# EAGLE board v1draft (EAGLE 7.3.0)
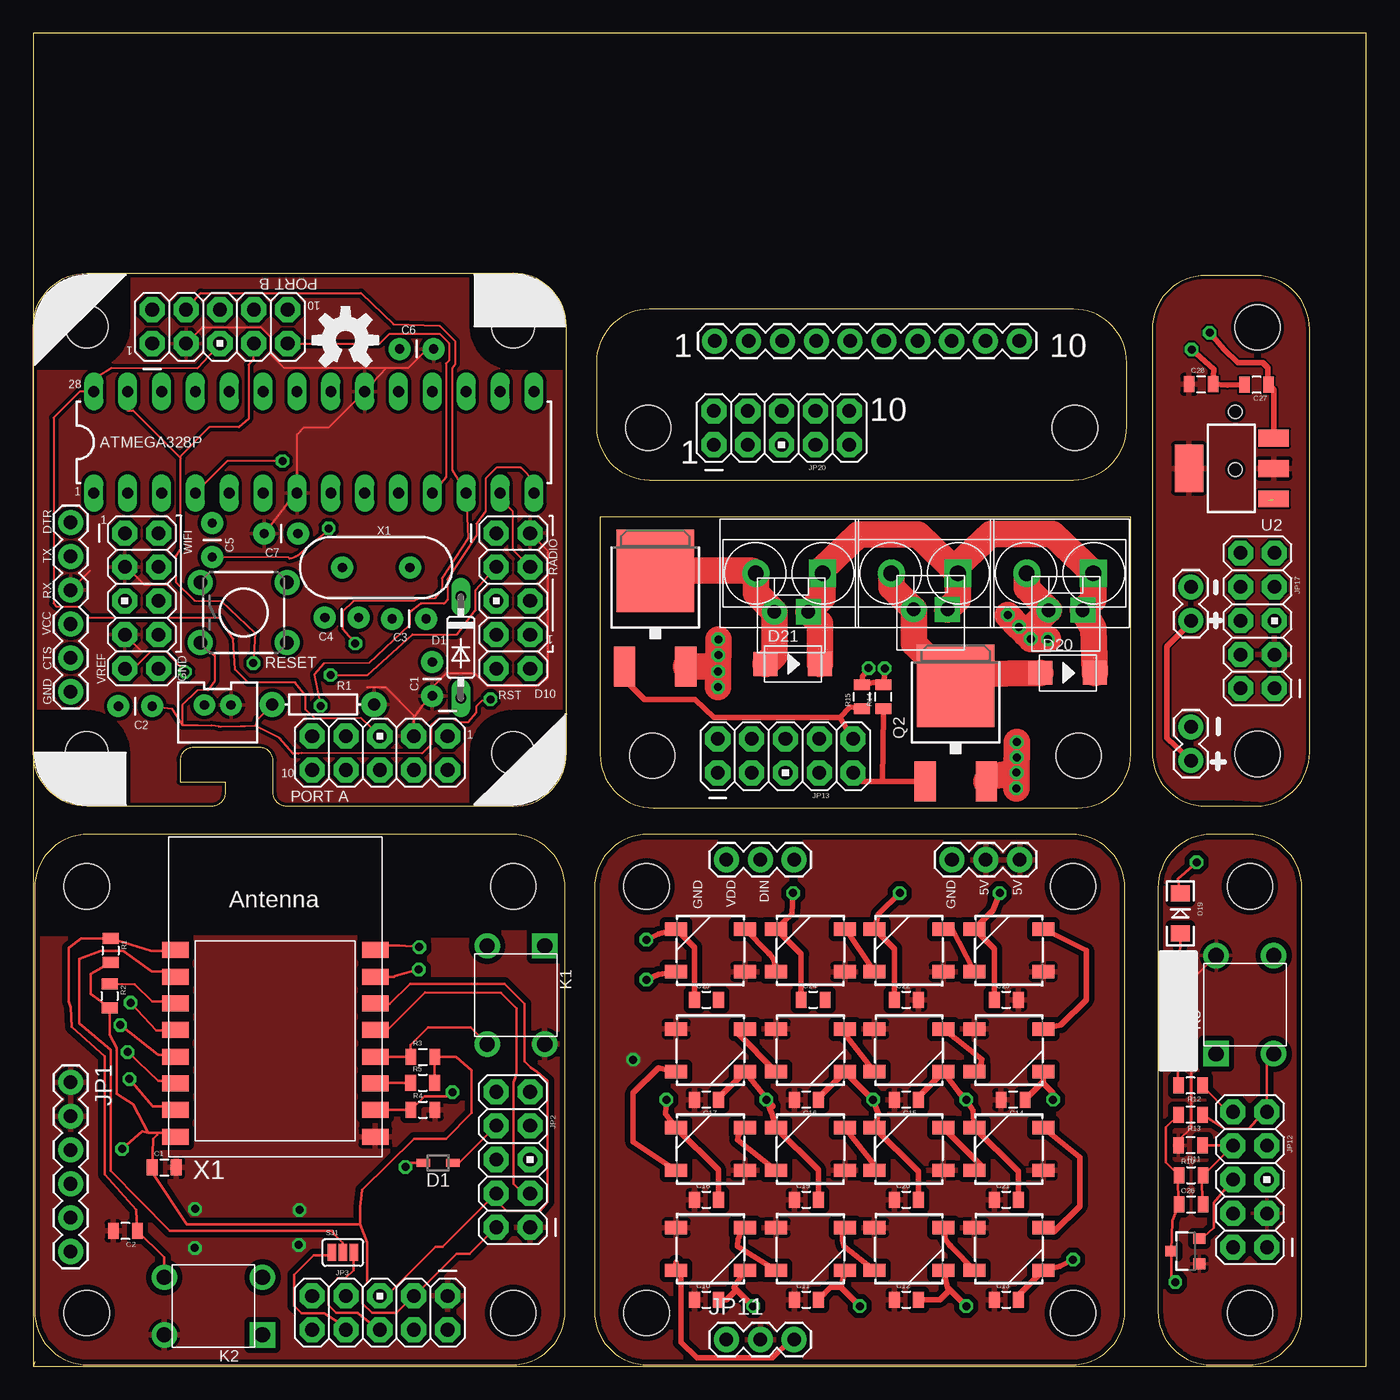
[diagram p0: board, top side]
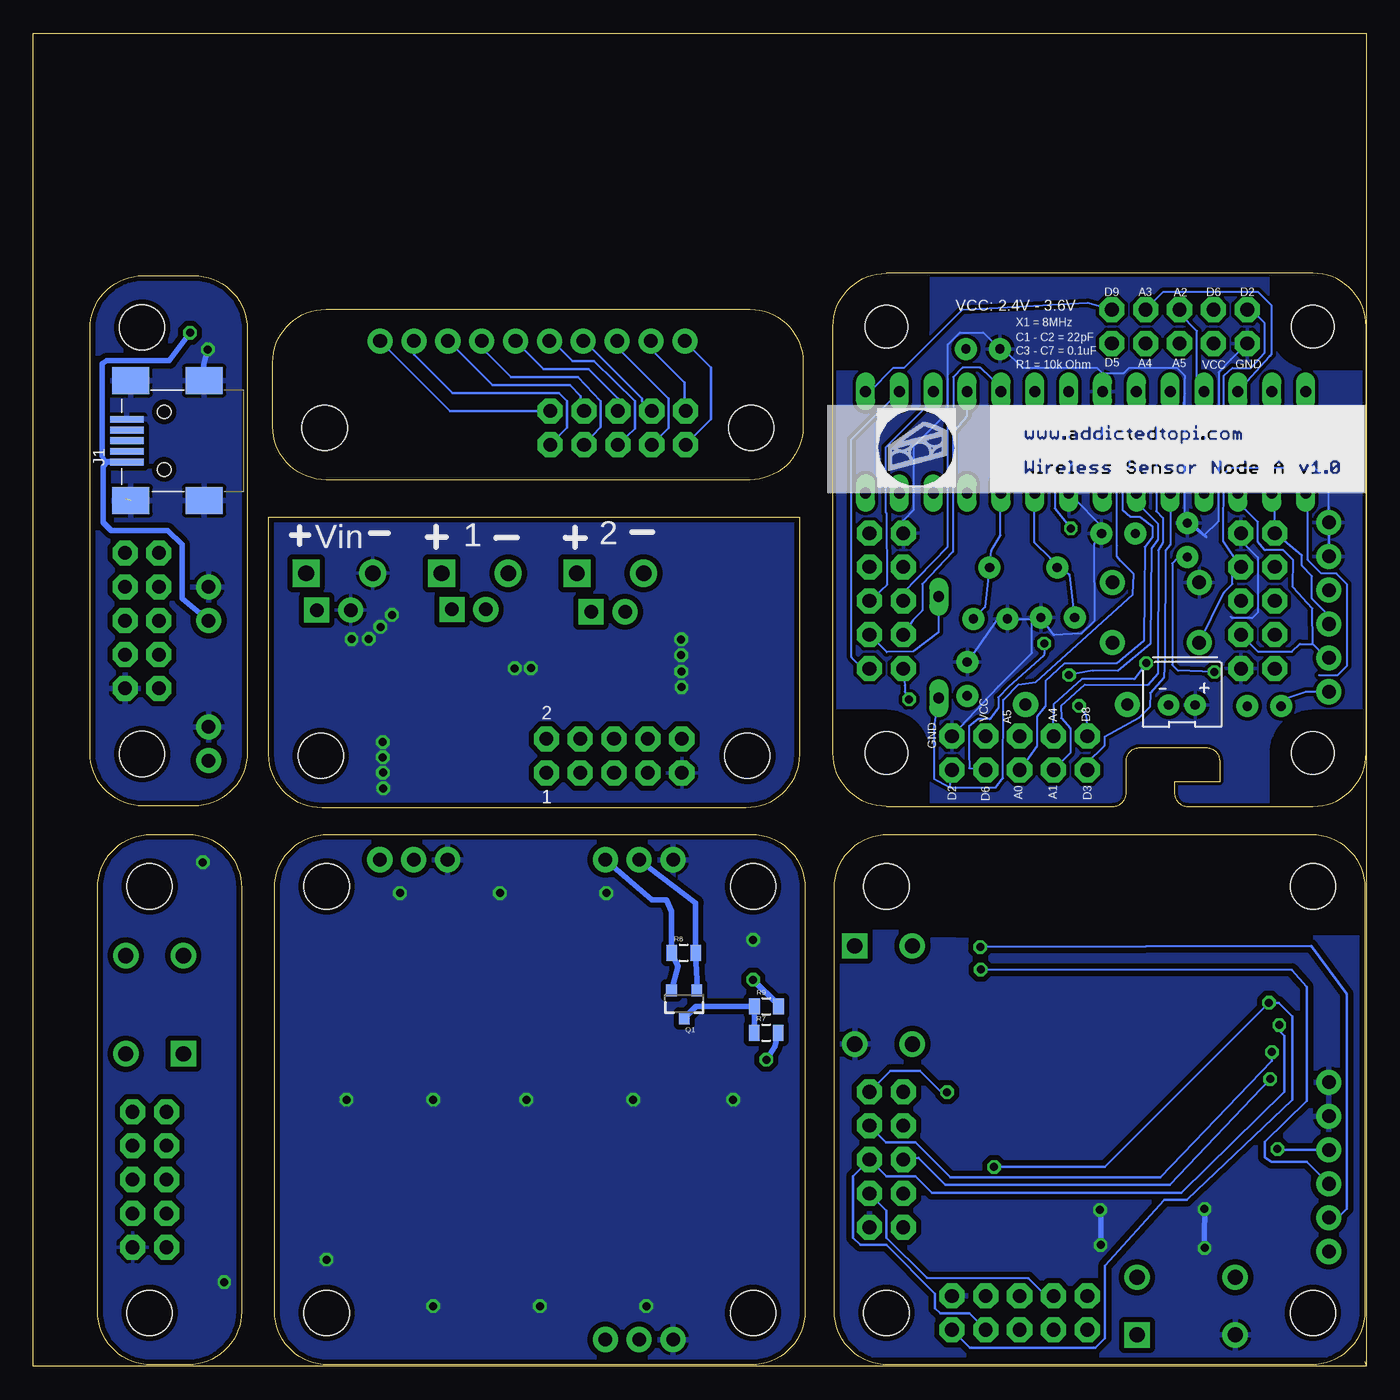
[diagram p1: board, bottom side, seen from below]

Size 100 x 100 mm. Coordinates in mm from the lower left corner, seen from the top.
Outline: 0.11,0.34 0,0
Outline: 0,0 100,0 100,100 0,100 0,0
Outline: 0.1,35.9 0.1,4.1 arc90 4.1,0.1 35.9,0.1 arc90 39.9,4.1 39.9,35.9 arc90 35.9,39.9 4.1,39.9 arc90 0.1,35.9
Outline: 36,42 19,42 arc-90 18,43 18,45.41 arc90 17,46.41 12,46.41 arc90 11,45.41 11,43.84 14.38,43.84 14.38,43 arc-90 13.38,42 4,42 arc-90 0,46 0,78 arc-90 4,82 36,82 arc-90 40,78 40,46 arc-90 36,42
Outline: 42.1,35.9 42.1,4.1 arc90 46.1,0.1 77.9,0.1 arc90 81.9,4.1 81.9,35.9 arc90 77.9,39.9 46.1,39.9 arc90 42.1,35.9
Outline: 88.38,0.1 91.18,0.1 arc90 95.18,4.1 95.18,35.9 arc90 91.18,39.9 88.38,39.9 arc90 84.38,35.9 84.38,4.1 arc90 88.38,0.1
Outline: 42.53,63.69 42.53,45.89 arc90 46.53,41.89 78.33,41.89 arc90 82.33,45.89 82.33,63.69 42.53,63.69
Outline: 87.95,42.03 91.75,42.03 arc90 95.75,46.03 95.75,77.83 arc90 91.75,81.83 87.95,81.83 arc90 83.95,77.83 83.95,46.03 arc90 87.95,42.03
Outline: 42.24,75.3 42.24,70.5 arc90 46.24,66.5 78.04,66.5 arc90 82.04,70.5 82.04,75.3 arc90 78.04,79.3 46.24,79.3 arc90 42.24,75.3
Copper layers (1*16): Top 0.035mm / dielectric 1.5mm / Bottom 0.035mm
Design rules "DFRobot_Eagle_Rule_v0.4": minimum track width 6mil, minimum drill 12mil, track to track 6mil, track to pad 6mil, pad to pad 6mil, via to via 6mil, smd to smd 0mil, copper to edge 10mil, drill to drill 10mil, minimum pad ring 12mil, minimum via ring 8mil, stop-mask expansion 2mil, vias tented up to drill 25mil, thermal gap 10mil
Holes 3.4 mm at 4,4 36,36 36,4 4,36 46,4 46,36 78,36 78,4 91.28,4 91.28,36 46.43,45.79 78.43,45.79 91.85,45.93 91.85,77.93 46.14,70.4 78.14,70.4
tRestrict: 16 lines
bRestrict: 16 lines

## Footprints (pad centres in the part's own frame; a part is rotated, then mirrored left to right if it is on the bottom)
0805 = smd 0.8 x 1.2: 1 -0.9,0; 2 0.9,0
CAP-PTH-SMALL = drill 0.7 pad 1.651: 1 0,0; 2 2.54,0
SOD323 = smd 1 x 0.6: 1 -1.1,0; 2 1.1,0
DO35-7 = drill 0.813 long: A 3.81,0; C -3.81,0
WS2812B = smd 1.651 x 1: 1 -2.577,1.6; 2 -2.577,-1.6; 3 2.577,-1.6; 4 2.577,1.6
LED-1206 = smd 1.2 x 1.4: A -1.5,0; C 1.5,0
DO-214AC = smd 1.8 x 1.77: 1 -2.042,0; 2 2.042,0
MINIUSB5+4P-SMD-0.8-90D = smd 2.54 x 0.508: 1 0.381,-1.6; 2 0.381,-0.8; 3 0.381,0; 4 0.381,0.8; 5 0.381,1.6 | smd 2.794 x 2: P$1 6.175,4.5; P$2 6.175,-4.5; P$3 0.675,4.5; P$4 0.675,-4.5 | hole 1.016: 3.175,-2.159; 3.175,2.159
1X06 = drill 1.016 pad 1.88: 1 0,0; 2 2.54,0; 3 5.08,0; 4 7.62,0; 5 10.16,0; 6 12.7,0
AVR_ICSP = drill 1.016 pad 1.88 octagon: 1 -1.27,5.08; 2 1.27,5.08; 3 -1.27,2.54; 4 1.27,2.54; 5 -1.27,0; 6 1.27,0; 7 -1.27,-2.54; 8 1.27,-2.54; 9 -1.27,-5.08; 10 1.27,-5.08
JST-2-PTH-VERT = drill 0.7 pad 1.6: 1 -1,-0.55; 2 1,-0.55
1X03 = drill 1.016 pad 1.88: 1 0,0; 2 2.54,0; 3 5.08,0
MOLEX-1X2 = drill 1.016 pad 1.88 square: 1 0,0 | drill 1.016 pad 1.88: 2 2.54,0
1X02 = drill 1.016 pad 1.88: 1 0,0; 2 2.54,0
1X10 = drill 1.016 pad 1.88: 1 0,0; 2 2.54,0; 3 5.08,0; 4 7.62,0; 5 10.16,0; 6 12.7,0; 7 15.24,0; 8 17.78,0; 9 20.32,0; 10 22.86,0
SW4-6.0X6.0X5.0MM = drill 1.143 pad 1.905 square: 1 -3.683,2.159 | drill 1.143 pad 1.905: 2 -3.683,-2.159; 3 3.683,-2.159; 4 3.683,2.159
SOT23-3 = smd 0.8 x 0.9: 1 -0.95,-1; 2 0.95,-1; 3 0,1.1
DPAK = smd 3 x 1.6: 1 0,-2.3; 2 0,2.3 | smd 6.2 x 5.8: 3 -7.18,0
AXIAL-0.3 = drill 0.9 pad 1.88: P$1 -3.81,0; P$2 3.81,0
TACTILE-PTH = drill 1.016 pad 1.88: 1 -3.251,2.261; 2 3.251,2.261; 3 -3.251,-2.261; 4 3.251,-2.261
PAD-JUMPER-3-NO_YES_SILK = smd 0.635 x 1.27: 1 -0.813,0; 2 0,0; 3 0.813,0
DIL28-3 = drill 0.813 long: 1 -16.51,-3.81; 2 -13.97,-3.81; 3 -11.43,-3.81; 4 -8.89,-3.81; 5 -6.35,-3.81; 6 -3.81,-3.81; 7 -1.27,-3.81; 8 1.27,-3.81; 9 3.81,-3.81; 10 6.35,-3.81; 11 8.89,-3.81; 12 11.43,-3.81; 13 13.97,-3.81; 14 16.51,-3.81; 15 16.51,3.81; 16 13.97,3.81; 17 11.43,3.81; 18 8.89,3.81; 19 6.35,3.81; 20 3.81,3.81; 21 1.27,3.81; 22 -1.27,3.81; 23 -3.81,3.81; 24 -6.35,3.81; 25 -8.89,3.81; 26 -11.43,3.81; 27 -13.97,3.81; 28 -16.51,3.81
SOT-223 = smd 1.27 x 2.286: 1 -2.286,-3.175; 2 0,-3.175; 3 2.286,-3.175 | smd 3.556 x 2.159: TER 0,3.175
DP4040_V1_NOLINES = hole 3.2: -16,-16; 16,-16; 16,16; -16,16
H2-5.0-10.5X8.0MM = drill 1.168 pad 2.032 square: 1 0,2.5 | drill 1.168 pad 2.032: 2 0,-2.5
ESP-12 = smd 2 x 1.2: 1 -7.5,4.5; 2 -7.5,2.5; 3 -7.5,0.5; 4 -7.5,-1.5; 5 -7.5,-3.5; 6 -7.5,-5.5; 7 -7.5,-7.5; 8 -7.5,-9.5; 9 7.5,-9.5; 10 7.5,-7.5; 11 7.5,-5.5; 12 7.5,-3.5; 13 7.5,-1.5; 14 7.5,0.5; 15 7.5,2.5; 16 7.5,4.5
HC49US = drill 0.7 pad 1.651: 1 -2.54,0; 2 2.54,0

## Placement (x,y rotation side)
C1  [0805]  9.82,14.91 0 top
C2  [0805]  6.9,10.15 180 top
C3  [CAP-PTH-SMALL]  29.93,50.29 90 top
C4  [CAP-PTH-SMALL]  8.92,49.51 180 top
C5  [CAP-PTH-SMALL]  29.46,56.07 180 top
C6  [CAP-PTH-SMALL]  21.87,56.17 0 top
C7  [CAP-PTH-SMALL]  13.42,60.71 90 top
C8  [CAP-PTH-SMALL]  30.03,76.32 180 top
C9  [CAP-PTH-SMALL]  17.32,62.47 0 top
C10  [0805]  50.5,5 0 top
C11  [0805]  58,5 0 top
C12  [0805]  65.5,5 0 top
C13  [0805]  73,5 0 top
C14  [0805]  73.5,20 180 top
C15  [0805]  65.5,20 180 top
C16  [0805]  58,20 180 top
C17  [0805]  50.5,20 180 top
C18  [0805]  50.5,12.5 0 top
C19  [0805]  58,12.5 0 top
C20  [0805]  65.5,12.5 0 top
C21  [0805]  73,12.5 0 top
C22  [0805]  65.5,27.5 0 top
C23  [0805]  50.5,27.5 0 top
C24  [0805]  58.5,27.5 0 top
C25  [0805]  73,27.5 0 top
C26  [0805]  86.86,12.13 0 top
C27  [0805]  91.78,73.64 180 top
C28  [0805]  87.61,73.67 0 top
D1  [SOD323]  30.37,15.26 180 top
D2  1N4148DO35-7  [DO35-7]  32.07,53.93 270 top
D3  [WS2812B]  50.8,23.7 0 top
D4  [WS2812B]  58.3,23.7 0 top
D5  [WS2812B]  65.7,23.7 0 top
D6  [WS2812B]  73.2,23.7 0 top
D7  [WS2812B]  73.2,16.3 180 top
D8  [WS2812B]  65.7,16.3 180 top
D9  [WS2812B]  58.3,16.3 180 top
D10  [WS2812B]  58.3,8.8 0 top
D11  [WS2812B]  65.7,8.8 0 top
D12  [WS2812B]  73.2,8.8 0 top
D13  [WS2812B]  73.2,31.2 180 top
D14  [WS2812B]  65.7,31.2 180 top
D15  [WS2812B]  58.3,31.2 180 top
D16  [WS2812B]  50.8,31.2 180 top
D17  [WS2812B]  50.8,16.3 180 top
D18  [WS2812B]  50.8,8.8 0 top
D19  [LED-1206]  86.05,33.96 90 top
D20  DIODE-GEN-PURPOSE-1KV-1A(DO-214AC)  [DO-214AC]  77.61,52.02 0 top
D21  DIODE-GEN-PURPOSE-1KV-1A(DO-214AC)  [DO-214AC]  56.99,52.68 0 top
J1  [MINIUSB5+4P-SMD-0.8-90D]  93.36,69.44 0 bottom
JP1  [1X06]  2.8,21.3 270 top
JP2  [AVR_ICSP]  36,15.5 180 top
JP3  [AVR_ICSP]  26,4 270 top
JP4  M05X2PTH  [AVR_ICSP]  14,78 90 top
JP5  M05X2PTH  [AVR_ICSP]  26,46 270 top
JP6  [1X06]  2.8,63.3 270 top
JP7  M02JST-PTH-VERT  [JST-2-PTH-VERT]  13.83,49.05 180 top
JP8  M05X2PTH  [AVR_ICSP]  8.13,57.42 0 top
JP9  [1X03]  74,38 180 top
JP10  [1X03]  52,38 0 top
JP11  [1X03]  52,2 0 top
JP12  [AVR_ICSP]  91.28,14 180 top
JP13  [AVR_ICSP]  56.43,45.79 90 top
JP14  [MOLEX-1X2]  68.59,56.78 180 top
JP15  [MOLEX-1X2]  58.14,56.6 180 top
JP16  [MOLEX-1X2]  78.73,56.72 180 top
JP17  [AVR_ICSP]  91.85,55.93 180 top
JP18  [1X02]  86.85,55.93 90 top
JP19  [1X02]  86.85,45.43 90 top
JP20  [AVR_ICSP]  56.14,70.4 90 top
JP21  [1X10]  51.12,76.91 0 top
K1  TS-1109  [SW4-6.0X6.0X5.0MM]  36.21,27.85 270 top
K2  TS-1109  [SW4-6.0X6.0X5.0MM]  13.51,4.51 180 top
K3  TS-1109  [SW4-6.0X6.0X5.0MM]  90.9,27.12 90 top
Q1  200mA/50V  [SOT23-3]  51.17,27.21 180 bottom
Q2  40V 51A  [DPAK]  69.2,43.88 270 top
Q3  40V 51A  [DPAK]  46.66,52.5 270 top
R1  [0805]  5.79,31.19 270 top
R2  [0805]  5.73,27.78 270 top
R3  [0805]  29.22,23.19 0 top
R4  [0805]  29.23,19.25 0 top
R5  [0805]  29.21,21.26 0 top
R6  [AXIAL-0.3]  21.74,49.65 180 top
R7  [0805]  45.02,25.02 0 bottom
R8  [0805]  51.21,31.02 0 bottom
R9  [0805]  45,27 0 bottom
R10  [0805]  86.85,14.33 0 top
R11  [0805]  86.82,16.57 180 top
R12  [0805]  86.82,21.06 180 top
R13  [0805]  86.83,18.86 180 top
R14  [0805]  63.77,50.23 90 top
R15  [0805]  62.15,50.23 90 top
RESET  SWITCH-MOMENTARY-2PTH  [TACTILE-PTH]  15.79,56.54 0 top
RF24  M05X2PTH  [AVR_ICSP]  36,57.42 0 top
SJ1  JUMPER-PAD-3-NOYES_SILK  [PAD-JUMPER-3-NO_YES_SILK]  23.22,8.53 0 top
U1  ATMEGA328P_PDIP  [DIL28-3]  21.05,69.32 0 top
U2  PMIC-CJT1117-3.3(SOT223)  [SOT-223]  89.88,67.36 90 top
U$1  [DP4040_V1_NOLINES]  20,62 0 top
U$2  MCP9700SMD  [SOT23-3]  86.47,8.63 90 top
U$3  2p-5.08  [H2-5.0-10.5X8.0MM]  66.87,59.49 270 top
U$4  2p-5.08  [H2-5.0-10.5X8.0MM]  56.71,59.49 270 top
U$5  [PI]  30.66,65.9 0 top
U$6  [OSHW-LOGO-M]  23.42,76.98 0 top
U$7  2p-5.08  [H2-5.0-10.5X8.0MM]  77.03,59.49 270 top
X1  [ESP-12]  18.16,26.72 0 top
Y1  [HC49US]  25.72,59.92 180 top

## Library data of the parts
C1 C2 C10-C28 = SparkFun-Capacitors
C3-C9 R1-R15 SJ1 = SparkFun-Passives
D1 = zetex; MPN: CDSOD323-T05C; OC_FARNELL: 1824860; OC_NEWARK: 79R6078
D2 = diode
D3-D18 = SparkFun-LED; PROD_ID: DIO-12503
D19 = SparkFun-LED
D20 D21 = Seeed-OPL-Diode; MPN: 1N4007
J1 = Seeed-OPL-Connector; MPN: ST-USB-002A
JP1 JP6 = SparkFun-Connectors; PROD_ID: CONN-08437
JP2-JP5 JP7-JP20 RF24 = SparkFun-Connectors
JP21 = SparkFun-Connectors; PROD_ID: CONN-11563
K1-K3 = Seeed-OPL-Button
Q1 = SparkFun-DiscreteSemi; PROD_ID: TRANS-00830
Q2 Q3 = Seeed-OPL-Transistor; MPN: NTD5805NT4G
RESET = SparkFun-Electromechanical
U1 = SparkFun-DigitalIC
U2 = Seeed-OPL-ic; MPN: CJT1117-3.3
U$1 = dp_devices_mod
U$2 = SparkFun-Sensors; PROD_ID: IC-08917
U$3 U$4 U$7 = Seeed-OPL-Connector; MPN: GS009S-2P-2
U$5 = mystuff
U$6 = SparkFun-Aesthetics
X1 = adafruit
Y1 = SparkFun-FreqCtrl

## Nets
3.3V: JP10.2 Q1.1 R8.2
ADC: SJ1.2 X1.2
DIN: JP10.3 Q1.2 R8.1
GND: C1.2 C2.2 JP1.1 JP1.2 JP2.1 JP3.1 K1.4 K2.4 R4.2 X1.9
GND1: C3.2 C5.2 C6.2 C7.2 C8.2 C9.2 JP4.1 JP5.1 JP6.1 JP6.2 JP7.2 JP8.2 JP8.10 RESET.1 RF24.1 U1.8 U1.22
GND2: C26.1 D19.C JP12.1 R10.1 R13.2 U$2.3
GND3: JP13.1 JP16.2 Q2.2 Q3.2 R14.2 R15.2 U$7.2
GND4: C27.2 C28.2 J1.5 J1.P$1 J1.P$2 J1.P$3 J1.P$4 JP17.1 JP18.2 JP19.2 U2.1
GPIO0: K1.3 R3.1 X1.12
GPIO2: R5.1 X1.11
GPIO4: JP2.3 JP3.7 X1.13
GPIO5: JP2.4 JP3.5 X1.14
GPIO12: JP3.9
GPIO13: JP3.10
GPIO14: JP2.5 JP3.4 X1.5
GPIO16: D1.2 JP3.2 X1.4
N$1: JP1.5 X1.16
N$2: JP1.4 X1.15
N$3: D2.A JP4.2 JP5.2 U1.4
N$4: JP3.6 SJ1.3
N$5: JP2.7 X1.6
N$6: JP2.6 X1.7
N$7: JP3.8 SJ1.1
N$8: C6.1 U1.9 Y1.2
N$9: D1.1 JP2.8
N$10: C2.1 K2.3 R1.1 X1.1
N$11: R2.1 X1.3
N$12: C5.1 U1.10 Y1.1
N$13: C7.1 JP8.9 U1.21
N$14: C4.2 JP6.6
N$15: C4.1 JP8.4 R6.P$2 RESET.3 RF24.9 U1.1
N$16: RF24.10 U1.16
N$17: JP4.4 JP5.4 U1.12
N$18: JP6.5 JP8.8 U1.3
N$19: JP6.4 JP8.1 U1.2
N$20: JP5.6 U1.23
N$21: JP4.5 JP5.5 U1.28
N$22: JP4.7 JP5.7 U1.27
N$23: JP5.8 U1.24
N$24: D2.C RF24.8
N$25: JP4.6 U1.25
N$26: JP4.8 U1.26
N$27: JP5.10 U1.5
N$28: RF24.4 U1.13
N$29: RF24.5 U1.19
N$30: RF24.7 U1.18
N$31: JP5.9 U1.14
N$32: RF24.6 U1.17
N$33: RF24.3 U1.6
N$34: JP4.10 U1.15
N$35: JP4.9 U1.11
N$36: D5.4 D6.2
N$37: D4.4 D5.2
N$38: D3.4 D4.2
N$39: D11.4 D12.2
N$40: D10.4 D11.2
N$41: D10.2 D18.4
N$42: D6.4 D13.2
N$43: D7.2 D12.4
N$44: D3.2 D17.4
N$45: D9.4 D17.2
N$46: D8.4 D9.2
N$47: D7.4 D8.2
N$48: D15.4 D16.2
N$49: D14.4 D15.2
N$50: D13.4 D14.2
N$51: D16.4 R9.2
N$52: D18.2 JP11.3
N$53: Q1.3 R7.1 R9.1
N$54: JP12.9 K3.2 R13.1
N$55: D19.A R12.2
N$56: JP12.10 R12.1
N$57: JP12.6 U$2.2
N$58: C26.2 JP12.8 R10.2 R11.1
N$59: D20.2 D21.2 JP14.1 JP15.1 JP16.1 U$3.1 U$4.1 U$7.1
N$60: D21.1 JP15.2 Q3.3 U$4.2
N$61: D20.1 JP14.2 Q2.3 U$3.2
N$62: JP13.9 Q2.1 R14.1
N$63: JP13.10 Q3.1 R15.1
N$64: C27.1 J1.1 JP18.1 JP19.1 U2.3
N$65: JP20.1 JP21.1
N$66: JP20.3 JP21.3
N$67: JP20.5 JP21.5
N$68: JP20.7 JP21.7
N$69: JP20.9 JP21.9
N$70: JP20.10 JP21.10
N$71: JP20.8 JP21.8
N$72: JP20.6 JP21.6
N$73: JP20.4 JP21.4
N$74: JP20.2 JP21.2
SPI_CS: JP2.9 R4.1 X1.10
VCC: C1.1 JP1.3 JP2.2 JP3.3 R1.2 R2.2 R3.2 R5.2 X1.8
VCC1: C3.1 C8.1 C9.1 JP4.3 JP5.3 JP6.3 JP7.1 JP8.3 JP8.7 R6.P$1 RF24.2 U1.7 U1.20
VDD: C10.1 C11.1 C12.1 C13.1 C14.2 C15.2 C16.2 C17.2 C18.1 C19.1 C20.1 C21.1 C22.2 C25.2 D3.1 D4.1 D5.1 D6.1 D7.1 D8.1 D9.1 D10.1 D11.1 D12.1 D13.1 D14.1 D15.1 D16.1 D17.1 D18.1 JP9.1 JP9.2 JP11.2 R7.2
VDD1: JP12.3 K3.4 R11.2 U$2.1
VDD2: C28.1 JP17.3 U2.2 U2.TER
VSS: C10.2 C11.2 C12.2 C13.2 C14.1 C15.1 C16.1 C17.1 C18.2 C19.2 C20.2 C21.2 C22.1 C23.1 C24.1 C25.1 D3.3 D4.3 D5.3 D6.3 D7.3 D8.3 D9.3 D10.3 D11.3 D12.3 D13.3 D14.3 D15.3 D16.3 D17.3 D18.3 JP9.3 JP10.1 JP11.1

## Tracks (layer width: path | path; a pad name or v marks a point on that pad's centre or on a via)
3.3V
  Bottom 0.4: Q1.1 50.22,28.93 R8.2 50.31,34.77 JP10.2
ADC
  Top 0.2: SJ1.2 23.22,9.25 22.57,9.9 22.4,10.14 10.24,10.14 5.79,14.66 5.79,23.74 3.45,25.73 3.45,30.55 5.05,31.15 6.74,31.15 8.88,29.63 10.25,29.63 X1.2
DIN
  Bottom 0.4: Q1.2 51.62,30.01 R8.1 52.11,34.11 52.5,35 53.58,35 JP10.3
GND  (via drill 0.6)
  Bottom 0.4: v19.92,9.09 19.92,11.67 v19.97,11.72 | 12.12,11.76 12.13,9.77 v12.13,8.88 v12.12,8.87
  other vias: 12.14,11.79
  pour Top (isolate 0.4): 0.4,39.52 39.48,39.52 39.48,0.4 0.53,0.4 0.53,20.19
  pour Bottom (isolate 0.4): 0.32,39.49 39.45,39.49 39.45,0.87 0.64,0.87 0.64,20.74
GND1
  Bottom 0.152: C6.2 23.42,54.85 21.39,54.98 20.39,55.92 20.42,61.69 20.09,62.23 C9.2 19.48,62.67 U1.8 22.35,65.54 22.35,67.4 19.78,69.97 U1.22 19.81,73.16 19.81,74.51 | JP6.2 JP6.1 2.8,66.34 4.45,67.98 10.85,67.98 10.97,67.86 10.97,67.65 11.1,67.5 11.1,63.39 12.14,62.37 | 19.81,74.51 20.22,74.92 25.81,74.92 27.21,76.32 C8.2 28.72,77.56 30.48,77.56 31.39,76.65 31.39,71.57 33.93,69.03 33.93,64.25 34.73,63.45 RF24.1 | C6.2 24.79,56.07 C5.2 27.69,56.07 C3.2 | JP5.1 27.6,51 25.08,53.52 25.08,55.78 C6.2 | 12.14,62.37 11.97,62.2 11.99,62.18 C7.2 | 12.14,62.37 13.61,63.84 13.6,72.99 | 13.6,72.99 13.61,74.11 13.61,74.31 14.22,74.92 17.78,74.92 18.19,74.51 19.81,74.51 | JP4.1 10.16,75.53 11.07,74.58 11.07,71.97 11.79,71.26 12.8,71.26 13.7,72.16 13.6,72.99 | JP8.2 9.4,61.94 8.13,60.67 8.13,56.55 8.56,56.12 10.06,56.12 10.16,56.22
  pour Bottom (isolate 0.254): 3.05,81.62 36.58,81.62 39.78,78.02 39.73,45.81 35.92,42.18 3.51,42.18 0.23,46.57 0.33,77.99
GND2  (via drill 0.6)
  Top 0.2: D19.C 85.85,36.57 v87.28,37.8 | R13.2 84.98,17.91 84.98,15.3 R10.1 85.86,13.54 C26.1 85.47,10.9 U$2.3 85.37,6.61 v85.68,6.3
  pour Bottom (isolate 0.4): 84.58,0.2 84.58,39.7 94.98,39.7 94.98,0.3 91.68,0.3
GND3  (via drill 0.6)
  Top 0.4: v62.67,52.37 62.19,51.76 R15.2 63.06,51.31 R14.2 63.85,51.78 v63.89,52.35
  Top 2: Q2.2 71.87,44.25 v73.77,44.54 | v73.78,46.82 v73.78,45.68 73.77,45.47 v73.77,44.54 | v73.77,44.54 v73.75,43.36 | v51.4,54.53 v51.4,53.35 51.38,53.33 v51.38,52.12 | v51.38,52.12 v51.37,52.11 v51.37,50.94 | v51.38,52.12 51,52.5 Q3.2 | U$7.2 74.53,58.38 JP16.2 74.44,54.98 74.42,54.98 | v73.1,56.37 73.1,56.31 v73.95,55.46 73.95,55.44 74.42,54.98 | 74.42,54.98 v74.83,54.56 v74.84,54.55 v76.12,54.55
  pour Bottom (isolate 0.4): 42.73,63.38 82.12,63.38 82.12,41.95 42.75,41.95 42.75,52.44
GND4  (via drill 0.6)  (1 unrouted)
  Top 0.4: C27.2 89.58,73.59 C28.2 88.55,74.81 v86.9,76.28
  Bottom 0.4: v86.9,76.28 87.21,75.14 J1.P$1
  pour Bottom (isolate 0.4): 95.5,42.18 95.5,81.48 84.45,81.48 84.45,42.38 89.65,42.38
GPIO0
  Top 0.2: X1.12 25.69,23.19 R3.1 28.32,24.12 29.61,25.41 32.81,25.41 K1.3
GPIO2
  Top 0.2: R5.1 25.7,21.26 X1.11
GPIO4
  Top 0.2: JP2.3 36.6,13.12 36.03,13.7 36.03,21.31 36.17,21.72 36.27,22.05 36.27,26.86 35.09,28.02 29.4,28.03 26.59,25.22 X1.13
  Bottom 0.2: JP2.3 35.98,11.67 35.98,9.63 32.94,6.64 25.36,6.59 24.04,5.27 JP3.7
GPIO5
  Top 0.2: JP3.5 26.49,5.27 30.17,8.95 30.72,8.95 JP2.4 34.73,12.43 35.49,11.67 38.01,11.67 38.57,12.34 38.57,21.4 37.8,22.1 37.29,22.41 36.84,22.86 36.84,27.19 35.34,28.69 28.25,28.69 26.74,27.18 25.7,27.18 X1.14
GPIO14  (via drill 0.6)
  Top 0.2: v6.52,25.59 9.35,23.36 10.52,23.36 X1.5
  Bottom 0.2: v6.52,25.59 6.52,25.17 6.14,24.79 6.16,20.58 13.88,13.01 32.6,13.01 33.83,14.24 36.01,14.24 JP2.5 38.51,14.26 38.51,9.64 37.96,9.09 36.01,9.09 32.34,5.42 32.34,4.36 31.96,3.98 29.77,3.98 28.54,2.75 JP3.4
GPIO16  (via drill 0.6)
  Top 0.2: v7.3,27.26 9.21,25.21 X1.4 | v27.92,14.95 28.23,15.26 D1.2
  Bottom 0.2: v27.92,14.95 19.61,14.95 v7.3,27.26 6.56,27.26 5.53,26.23 5.54,19.97 13.47,12.49 15.16,12.49 19.6,7.52 19.6,2.09 20.31,1.38 29.73,1.38 JP3.2
N$1  (via drill 0.6)
  Top 0.2: v28.96,31.45 27.43,31.57 26.01,31.57 X1.16
  Bottom 0.2: v28.96,31.45 4.13,31.52 1.47,27.93 1.47,11.81 2.14,11.14 JP1.5
N$2  (via drill 0.6)
  Top 0.2: v28.92,29.76 27.13,29.29 27.06,29.22 X1.15
  Bottom 0.2: v28.92,29.76 5.6,29.74 4.45,28.44 4.45,19.9 7.62,16.82 7.62,15.66 7.11,15.34 4.45,15.33 JP1.4
N$3  (via drill 0.6)
  Top 0.152: v18.69,67.91 14.56,67.91 U1.4
  Bottom 0.152: JP5.2 31.28,43.43 | 31.28,43.43 32.42,44.06 32.42,47.77 D2.A | U1.4 12.06,70.11 10.67,71.77 10.67,74.31 10.03,74.89 8.66,74.89 7.62,76.04 7.62,78.27 8.62,79.27 JP4.2 | 31.28,43.43 27.77,43.42 27.24,44.12 27.23,49.99 26.08,51.14 24.79,51.32 17.51,57.9 17.45,59.45 18.39,60.39 18.72,60.77 18.69,61.56 v18.69,67.91
N$4
  Top 0.2: SJ1.3 24.02,7.18 23.39,6.58 22.82,6.58 22.16,5.92 22.16,4.56 22.71,4.01 24.33,4.01 24.41,3.93 25.9,2.73 JP3.6
N$5  (via drill 0.6)
  Top 0.2: v7.07,23.57 9.38,21.42 10.46,21.42 X1.6
  Bottom 0.2: JP2.7 36.04,16.81 33.81,16.79 31.18,14.16 15.45,14.16 7.07,22.91 v7.07,23.57
N$6  (via drill 0.6)
  Top 0.2: v7.21,21.55 8.97,19.48 10.4,19.48 X1.7
  Bottom 0.2: JP2.6 33.59,15.62 31.56,13.59 14.75,13.59 v7.21,21.55
N$7
  Top 0.2: SJ1.1 22.2,8.32 21.03,8.32 19.56,6.85 19.56,4.52 20.12,3.96 21.82,3.96 23.46,2.91 JP3.8
N$8
  Bottom 0.152: C6.1 22.25,59.37 Y1.2 23.71,60.63 24.89,61.81 24.89,65.47 U1.9
N$9
  Top 0.2: D1.1 31.95,15.26 JP2.8
N$10
  Top 0.2: K2.3 9.83,8.17 C2.1 7.7,11.73 5.34,14.4 5.34,23.26 2.89,25.45 2.8,26.92 2.66,27.38 2.65,31.37 3.59,32.09 R1.1 8.83,31.15 10.59,31.15 X1.1
N$11
  Top 0.2: R2.1 7.61,28.66 8.91,27.37 10.51,27.37 X1.3
N$12
  Bottom 0.152: C5.1 28.59,56.95 Y1.1 28.11,61.19 27.43,62.32 27.43,65.47 U1.10
N$13  (via drill 0.6)
  Top 0.152: v22.16,62.86 21.65,62.29 20.09,61 arc-36 19.23,60.59 19.16,60.65 C7.1 | JP8.9 7.54,52.34 8.81,53.61 9.98,53.61 v11.38,52.08
  Bottom 0.152: U1.21 22.32,68.45 23.37,67.4 23.37,64.35 v22.16,62.86 | C7.1 14.08,60.71 14.55,60.24 14.55,52.62 14.12,52.19 v11.38,52.08
N$14
  Bottom 0.152: JP6.6 4.54,50.6 6.1,50.06 6.1,49.96 C4.2
N$15  (via drill 0.6)
  Top 0.152: v34.3,50.03 33.64,49.91 33.22,49.49 33.22,49.04 32.59,48.3 32.23,48.3 31.99,48.29 31.51,48.56 30.39,48.57 29.84,48.08 29.84,46.65 29.79,46.59 29.16,45.98 20.12,45.99 19.89,45.96 19.48,45.96 18.47,47.13 16.69,48.05 | 16.69,48.05 15.88,47.99 15.57,47.99 14.07,47.97 13.94,47.99 13.35,48.07 12.36,48.1 11.18,48.1 | 16.69,48.05 16.82,48.53 R6.P$2 | C4.1 10.38,49.33 11.18,48.1 | RESET.3 12.53,54.23 13.61,53.33 13.61,51.42 13.12,50.72 12.3,50.7 11.18,49.62 11.18,48.1
  Bottom 0.152: 3.56,51.85 2.13,51.85 1.42,52.57 1.42,58.66 2.23,59.48 3.35,59.48 4.37,60.49 4.37,65.34 U1.1 4.54,65.84 6.1,67.4 10.06,67.4 10.67,66.99 10.72,61.92 JP8.4 10.03,59.33 10.03,58.69 10.68,58.04 RESET.3 | RF24.9 34.73,52.14 34.62,51.03 34.62,51.09 34.61,50.59 v34.3,50.03
N$16
  Bottom 0.152: RF24.10 37.77,52.34 38.61,53.18 38.61,69.54 U1.16
N$17  (via drill 0.6)
  Top 0.152: v24.16,54.22 23.19,55.31 23.19,56.63 24.03,57.42 28.57,57.42 28.83,57.57 28.88,57.57 30.1,57.6 30.66,58.31 30.66,59.12 32.61,62.14 32.48,65.34 U1.12 31.42,67.23 31.42,74.89 31.65,75.2 31.65,76.9 30.48,78.07 27.03,78.17 24.59,80.51 12.56,80.51 JP4.4
  Bottom 0.152: v24.16,54.22 24.16,53.49 24.19,53.34 26.8,51 27.61,50.18 27.61,49.42 28.25,48.55 29.11,48.55 29.8,48 29.8,46 29.77,44.86 JP5.4
N$18
  Bottom 0.152: JP6.5 3.01,53.14 4.01,54.19 | 4.01,54.19 4.04,56.86 5.51,58.46 5.49,60.47 6.22,61.23 7.59,61.23 8.13,61.86 8.13,63.34 9.62,64.83 U1.3 | JP8.8 8.13,53.61 5.56,53.61 4.98,54.19 4.01,54.19
N$19
  Bottom 0.152: JP6.4 2.8,56.33 4.06,57.6 4.06,59.27 4.83,60.09 4.83,60.82 JP8.1 6.86,65.28 U1.2
N$20
  Bottom 0.152: U1.23 17.24,72.51 18.29,71.46 18.29,70.04 17.78,69.53 17.78,67.5 18.29,66.99 18.29,64.25 17.68,63.74 16.97,63.74 16.05,63.03 16.05,62.22 16.61,61.46 16.69,54.42 18.69,52.72 22.63,52.72 24.05,51.4 24.05,49.52 24.7,48.75 24.7,46.53 JP5.6
N$21
  Top 0.152: JP5.5 24.6,48.62 23.8,48.6 21.16,48.58 20.42,49.26 20.42,50.31 19.66,51.3 16.13,51.3 15.14,52.26 15.01,54.57 14.07,56.02 13.95,56.15 4.22,56.15 3.4,56.96 1.8,56.96 1.52,57.24 1.52,71.16 3.49,73.13 U1.28 4.71,73.13 4.71,74.17 4.8,74.26 5.88,74.9 12.32,74.88 JP4.5
N$22  (via drill 0.6)
  Top 0.152: 10.97,68.21 7.49,71.7 7.08,71.7 U1.27 | 10.97,68.21 11.07,68.11 11.07,61.35 10.67,60.8 10.69,58.84 12.09,57.44 14.1,57.39 16.66,55.01 v16.51,52.74 | 10.97,68.21 13.21,70.45 15.44,70.45 16.15,71.06 16.15,75.12 16.54,75.55 JP4.7
  Bottom 0.152: JP5.7 23.43,49.68 21.34,51.55 17.4,51.55 v16.51,52.74
N$23
  Bottom 0.152: U1.24 14.7,72.72 15.75,71.67 15.75,64.15 15.24,63.64 15.24,61.81 15.6,61.23 15.62,51.98 16.38,51.12 21.1,51.13 22.91,49.53 22.89,48.63 22.2,47.83 22.2,46 JP5.8
N$24
  Bottom 0.152: D2.C 32.09,55.06 33.97,53.64 35.97,53.58 RF24.8
N$25
  Bottom 0.152: U1.25 12.7,73.67 12.7,77.66 14,78.96 JP4.6
N$26
  Bottom 0.152: U1.26 7.23,75.79 7.11,75.91 7.11,79.59 8.13,80.61 15.2,80.61 JP4.8
N$27
  Bottom 0.152: U1.5 14.7,61.64 15.06,61.18 15.11,53.2 15.16,51.65 16.2,50.51 16.25,49.45 17.06,48.64 19.63,47.21 19.66,46.52 20.93,45.28 JP5.10
N$28
  Top 0.152: U1.13 35.02,65.09 35.97,64.15 35.97,61.26 RF24.4
N$29
  Bottom 0.152: RF24.5 34.76,58.02 31.39,61.49 31.39,70.55 30.99,71.06 30.99,74.21 30.28,74.92 28.95,74.92 27.4,73.46 U1.19
N$30
  Bottom 0.152: U1.18 29.94,71.29 30.99,70.04 30.99,61.11 33.3,58.7 33.3,56.7 34,56 RF24.7
N$31  (via drill 0.6)
  Top 0.152: U1.14 37.56,66.42 36.58,67.4 34.75,67.4 33.93,66.59 33.93,64.15 33.25,63.21 33.25,62.34 31.06,59.04 31.06,57.52 30.81,57.22 29.11,57.22 28.25,56.55 28.25,55.61 25.2,52.77 21.79,52.72 21.08,51.91 v21.54,49.54
  Bottom 0.152: JP5.9 20.93,48.1 21.01,48.84 v21.54,49.54
N$32
  Bottom 0.152: U1.17 32.48,72.51 36.07,68.92 36.07,64.07 36,64 35.97,58.62 RF24.6
N$33  (via drill 0.6)
  Top 0.152: v22.3,51.85 25.07,51.85 28.45,54.9 31.77,54.9 33.2,56.72 33.2,58.23 RF24.3
  Bottom 0.152: U1.6 17.24,64.83 15.65,63.23 15.65,62.02 16.1,61.35 16.2,54.19 18.64,52.16 20.5,52.19 v22.3,51.85
N$34
  Bottom 0.152: U1.15 37.25,73.13 35.46,74.92 34.65,74.92 30.28,79.29 20.9,79.79 JP4.10
N$35
  Top 0.152: JP4.9 25.99,76.73 26.72,77.46 30.48,77.46 31.19,76.75 31.19,75.45 30.96,75.22 30.96,66.71 U1.11
N$36
  Top 0.4: D6.2 arc45 71.17,23 D5.4
N$37
  Top 0.4: D4.4 arc45 60.83,25 D5.2
N$38
  Top 0.4: D3.4 arc45 52.83,25 D4.2
N$39
  Top 0.4: D11.4 arc45 68.83,9 D12.2
N$40
  Top 0.4: D10.4 arc45 60.83,9 D11.2
N$41
  Top 0.4: D18.4 arc45 52.83,9 D10.2
N$42
  Top 0.4: D13.2 79,31.18 79,27.5 77.1,25.6 D6.4
N$43
  Top 0.4: D7.2 78.5,15.68 78.5,12 76.58,10.08 D12.4
N$44
  Top 0.4: D17.4 45,16.82 45,20.5 46.9,22.4 D3.2
N$45
  Top 0.4: D17.2 arc45 52.83,17 D9.4
N$46
  Top 0.4: D8.4 arc45 63.17,15 D9.2
N$47
  Top 0.4: D7.4 arc45 71.17,15 D8.2
N$48
  Top 0.4: D15.4 arc45 55.17,31 D16.2
N$49
  Top 0.4: D15.2 arc45 60.83,33 D14.4
N$50
  Top 0.4: D14.2 arc45 68.83,33 D13.4
N$51  (via drill 0.6)
  Top 0.4: D16.4 46.9,29.4 v46,29
  Bottom 0.4: R9.2 44.1,27.1 v46,29
N$52
  Top 0.4: 48.22,7.78 D18.2 48.59,6.83 48.59,1.81 49.78,0.62 55.46,0.62 56.84,2 JP11.3
N$53
  Bottom 0.4: R7.1 45.9,25.04 R9.1 50.28,27 Q1.3
N$54
  Top 0.2: 92.55,19.33 91.18,17.8 89.39,17.8 R13.1 | JP12.9 92.55,19.33 | 92.55,19.33 92.55,22.93 K3.2
N$55
  Top 0.2: D19.A 85.85,21.13 R12.2
N$56
  Top 0.2: R12.1 89.79,18.86 JP12.10
N$57
  Top 0.2: U$2.2 87.47,9.39 88.58,10.4 88.58,12.27 JP12.6
N$58
  Top 0.2: C26.2 87.66,13.54 R10.2 87.75,14.28 JP12.8 89.98,16.57 R11.1
N$59
  Top 2: U$3.1 69.37,57.56 JP14.1 | D20.2 79.54,55.34 JP16.1 79.53,57.52 U$7.1 76.44,62.43 71.85,62.43 69.37,60.1 U$3.1 | D21.2 59.03,55.71 JP15.1 59.21,57.67 U$4.1 59.21,59.82 61.89,62.39 66.36,62.39 U$3.1
N$60
  Top 2: Q3.3 53.75,59.68 arc-45 U$4.2 54.21,57.99 JP15.2 55.6,53.33 D21.1
N$61
  Top 2: D20.1 70.66,51.94 68.85,51.47 68.85,51.41 Q2.3 66.05,54.21 JP14.2 64.37,58.46 U$3.2
N$62
  Top 0.4: JP13.9 62.15,43.88 63.72,43.88 | 63.72,43.88 Q2.1 | R14.1 63.79,49.06 63.72,43.88
N$63
  Top 0.4: JP13.10 60.5,48.66 | 60.5,48.66 58.97,48.67 51.05,48.66 49.65,50.03 45.86,50.03 44.36,51.53 Q3.1 | R15.1 61.26,49.46 60.5,48.66
N$64  (via drill 0.6)
  Top 0.4: JP19.1 85.05,47.15 85.05,53.98 86.78,55.71 JP18.1 | U2.3 93.06,73.27 C27.1 92.6,73.72 92.6,74.93 92.25,75.28 90.35,75.28 89.35,76.28 v88.25,77.53
  Bottom 0.4: JP18.1 88.85,57.6 88.85,61.63 89.9,62.68 94.15,62.68 94.75,63.28 94.75,67.48 94.4,67.88 93.8,67.88 93.76,67.84 J1.1 94.61,67.84 94.85,68.28 94.85,75.23 94.5,75.43 89.8,75.43 v88.25,77.53
N$65
  Bottom 0.2: JP20.1 49.14,71.05 49.14,74.9 51.12,76.88 JP21.1
N$66
  Bottom 0.2: JP20.3 52.34,70.39 52.34,72.6 56.2,76.46 JP21.3
N$67
  Bottom 0.2: JP20.5 54.84,70.33 54.84,72.4 57.94,75.4 59.54,75.4 61.05,76.91 JP21.5
N$68
  Bottom 0.2: JP20.7 57.44,70.47 57.44,72.4 59.14,74.2 64.14,74.2 66.36,76.42 JP21.7
N$69
  Bottom 0.2: JP20.9 59.94,70.41 59.94,72.4 60.54,73 68.54,73 71.44,75.9 JP21.9
N$70
  Bottom 0.2: JP20.10 68.74,71.67 JP21.10
N$71
  Bottom 0.2: JP20.8 58.94,71.93 58.94,72.8 59.74,73.6 65.54,73.6 68.85,76.91 JP21.8
N$72
  Bottom 0.2: JP20.6 56.14,72.6 58.34,74.8 61.71,74.8 JP21.6
N$73
  Bottom 0.2: JP20.4 54.34,72.41 54.34,72.6 58.65,76.91 JP21.4
N$74
  Bottom 0.2: JP20.2 51.14,71.75 51.14,73.8 53.66,76.32 JP21.2
SPI_CS  (via drill 0.6)
  Top 0.2: v31.44,20.54 v31.45,20.55 31.15,20.25 29.35,20.25 28.35,19.25 R4.1 25.69,19.25 X1.10
  Bottom 0.2: JP2.9 35.68,22.17 33.5,22.17 31.88,20.55 v31.45,20.55
VCC  (via drill 0.6)
  Top 0.2: R1.2 4.37,29.48 4.31,29.42 4.31,27.93 R2.2 5.73,24.86 6.25,23.89 6.25,20.44 7.48,19.66 8.61,17.52 | 8.61,17.52 9.28,17.52 | JP2.2 32.73,8.42 31.76,8.42 28.61,5.27 JP3.3 27.26,3.99 25.4,3.99 24.69,4.7 24.69,5.9 25.03,6.24 25.03,9.31 24.5,10.63 | 24.5,10.63 11.52,10.63 8.92,14.56 C1.1 8.98,17.07 9.28,17.37 9.28,17.52 | 24.5,10.63 24.5,11.93 24.68,13.22 28.55,17.06 30.95,17.06 32.88,19.02 32.88,22.2 31.71,23.19 R3.2 R5.2 | v6.66,16.3 8.16,17.61 8.61,17.52 | 9.28,17.52 10.36,17.52 X1.8
  Bottom 0.2: JP1.3 6.94,16.22 v6.66,16.3
VCC1
  Top 0.152: U1.20 22.18,70.45 20.32,70.45 19.78,69.91 U1.7 19.65,65.51 C9.1 | 24.93,73.13 24.93,73.23 26.52,74.92 | 26.52,74.92 28.14,74.92 29.46,76.24 29.94,76.24 C8.1 | 4.27,59.69 JP6.3 | RF24.2 38.61,61.16 38.61,51.65 37.69,51.04 34.05,51.05 33.1,52 31,52 29.93,50.93 C3.1 29.23,49.59 28.54,48.59 JP5.3 28.52,48.73 28.52,48.83 26.42,50.94 25.02,50.94 | 26.52,74.92 26.42,74.92 18.8,74.92 17.78,75.93 17.78,77.25 17.07,77.97 12.7,77.97 JP4.3 | 6.86,54.95 JP8.7 6.88,54.88 8.13,53.63 | JP8.3 7.01,59.96 8.31,58.66 10.03,58.66 10.08,58.71
  pour Top (isolate 0.254): 35.62,42 4,42 arc-90 0,46 0,77.62 arc-90 4,81.62 35.62,81.62 arc-90 39.62,77.62 39.62,46 arc-90
VDD  (via drill 0.6)
  Bottom 0.4: v45,23 44.36,24 R7.2
  pour Top (isolate 0.4): 42.5,39.5 42.5,0.5 81.5,0.5 81.5,39.5 60,39.5
VDD1
  Top 0.2: R11.2 85.92,16.94 86.88,17.9 86.88,28.94 K3.4
  pour Top (isolate 0.4): 95.18,0.1 95.18,39.8 84.48,39.8 84.48,0.4 89.58,0.4
VDD2
  pour Top: 95.5,42.28 95.5,81.53 84.4,81.53 84.4,42.68 89.55,42.68
VSS  (via drill 0.6)
  Top 0.4: v54,4.5 52.75,5.75 | 52.75,5.75 52.58,5.92 D18.3 | v62,4.5 60.58,5.92 | 60.58,5.92 D10.3 | v70,4.5 68.75,5.75 | 68.75,5.75 68.58,5.92 D11.3 | v78,8 77,7.48 D12.3 73.9,5.32 C13.2 | v46,32 46.92,32.42 D16.3 49.6,31.42 C23.1 | v57,35.5 56.92,33.92 D15.3 57.6,30.92 C24.1 | v65,35.5 63.42,33.92 D14.3 64.6,31.32 C22.1 | v72.5,35.5 72,34.18 D13.3 72.1,31.32 C25.1 | v47.5,20 47.42,18.92 D17.3 51.4,14.72 C18.2 | C10.2 52,5 52.75,5.75 | 60.58,5.92 59.82,5.92 C11.2 | C12.2 68,5 68.75,5.75 | C21.2 73.9,14.62 D7.3 70.5,19.18 v70,20 69.48,20.5 D5.3 66.4,20.22 C15.1 | C20.2 66.4,14.62 D8.3 63.42,18.92 v63,20 62.98,20 D4.3 58.9,20.12 C16.1 | C19.2 58.9,14.72 D9.3 55.42,18.92 v55,20 55.48,19.5 D3.3 51.4,20.12 C17.1 | D6.3 75.78,21.38 75.7,21.3 | 75.7,21.3 C14.1 | v76.5,20 76.5,20.5 75.7,21.3
  pour Bottom (isolate 0.4): 42.5,39.5 42.5,0.5 81.5,0.5 81.5,39.5 58,39.5

## Text on the board
tPlace: PORT B | 10 | 1 | C6 | 28 | ATMEGA328P | 1 | 1 | DTR | X1 | WIFI | C5 | C7 | TX | RADIO | RX | VCC | 1 | C4 | C3 | D1 | CTS | RESET | VREF | GND | R1 | C1 | GND | RST | D10 | C2 | 1 | 10 | PORT A
bPlace: D2 | D6 | A2 | A3 | D9 | VCC: 2.4V - 3.6V | X1 = 8MHz | C1 - C2 = 22pF | C3 - C7 = 0.1uF | GND | VCC | A5 | A4 | D5 | R1 = 10k Ohm | 2 | 1 | Vin | 2 | D8 | A4 | A5 | VCC | GND | D3 | A1 | A0 | D6 | D2 | 1
tNames: 1 | 10 | 10 | 1 | GND | VDD | DIN | GND | 5V | 5V